# EAGLE board ldd-boardv4 (EAGLE 8.2.1)
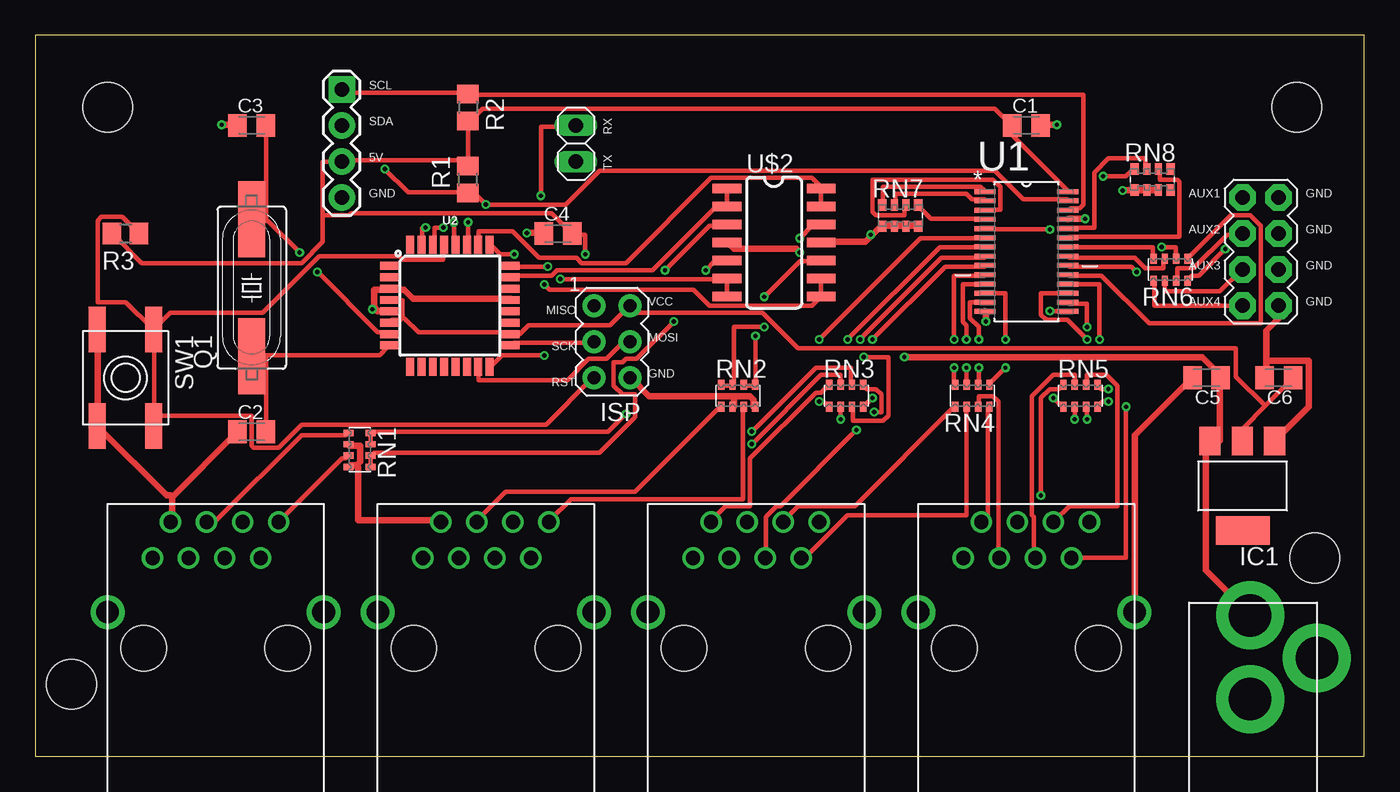
[diagram p0: board, top side]
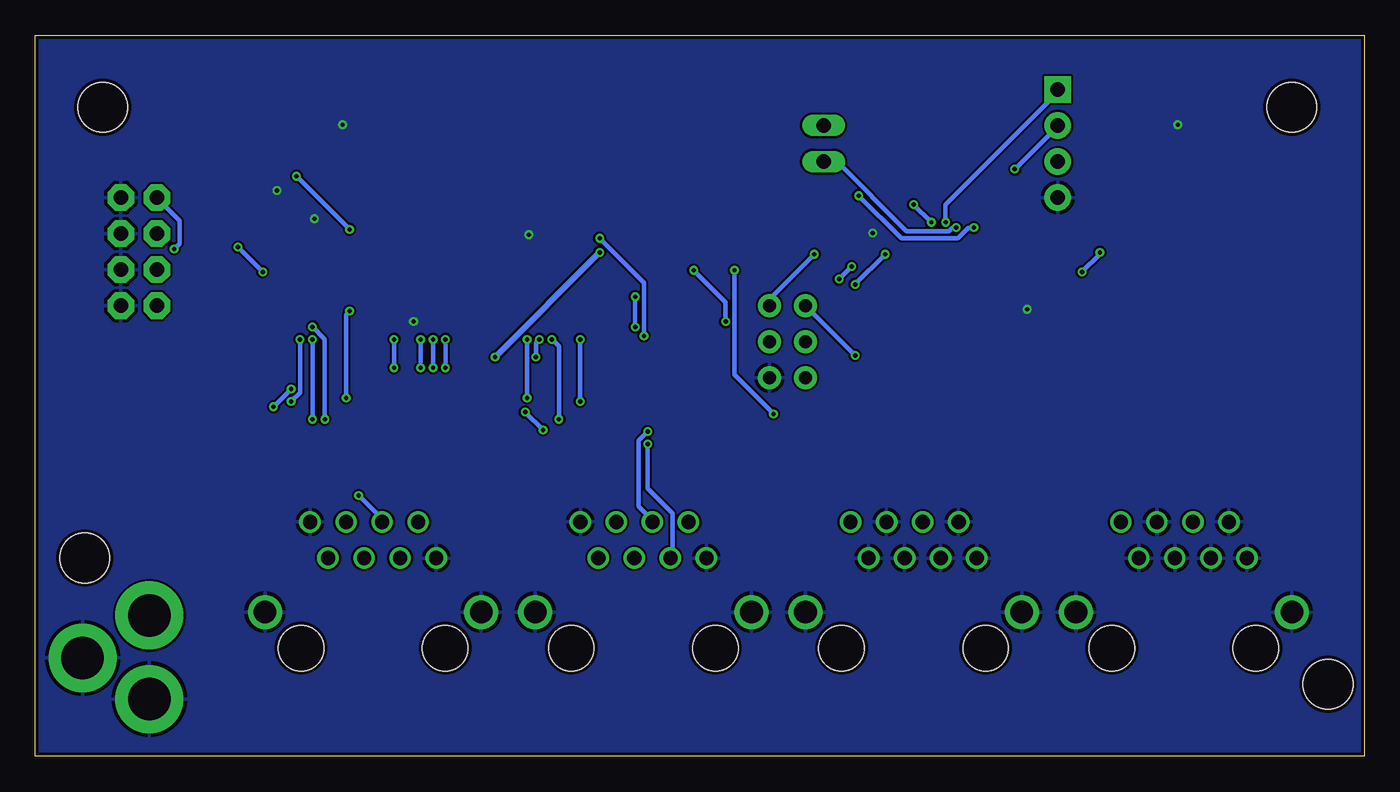
[diagram p1: board, bottom side, seen from below]

Size 93.65 x 50.79 mm. Coordinates in mm from the lower left corner, seen from the top.
Outline: 0,0 93.65,0 93.65,50.79 0,50.79 0,0
Copper layers (1*16): Top 0.035mm / dielectric 1.5mm / Bottom 0.035mm
Design rules "SeeedStudio_2layer_DRU_no_angle_20140221": minimum track width 6mil, minimum drill 12mil, track to track 6mil, track to pad 6mil, pad to pad 6mil, via to via 6mil, smd to smd 0mil, copper to edge 10mil, drill to drill 10mil, minimum pad ring 10mil, minimum via ring 6mil, stop-mask expansion 2mil, vias tented up to drill 100mil, thermal gap 10mil
Net classes: 0 default: width 0.305 mm; 1 Supply: width 0.457 mm
Holes 3.5 mm at 88.9,45.72 90.17,13.97 5.08,45.72 2.54,5.08

## Footprints (pad centres in the part's own frame; a part is rotated, then mirrored left to right if it is on the bottom)
C0805K = smd 1.3 x 1.6: 1 -1,0; 2 1,0
SOT223 = smd 1.499 x 2.007: 1 -2.261,-3.15; 2 0.025,-3.15; 3 2.311,-3.15 | smd 3.81 x 2.007: 4 0,3.15
AVRISP = drill 0.9 pad 1.626: 1 -1.27,2.54; 2 1.27,2.54; 3 -1.27,0; 4 1.27,0; 5 -1.27,-2.54; 6 1.27,-2.54
2X4 = drill 1.016 pad 1.88 octagon: 1 -3.81,-1.27; 2 -3.81,1.27; 3 -1.27,-1.27; 4 -1.27,1.27; 5 1.27,-1.27; 6 1.27,1.27; 7 3.81,-1.27; 8 3.81,1.27
1X04 = drill 1.016 pad 1.88 square: 1 0,0 | drill 1.016 pad 1.88: 2 2.54,0; 3 5.08,0; 4 7.62,0
1X02 = drill 1.016 long: 1 -1.27,0; 2 1.27,0
HC49UP = smd 5.334 x 1.93: 1 -4.826,0; 2 4.826,0
R0805 = smd 1.3 x 1.5: 1 -0.95,0; 2 0.95,0
EXBV8V = smd 0.45 x 0.7: 1 -1.2,-0.775; 2 -0.4,-0.775; 3 0.4,-0.775; 4 1.2,-0.775; 5 1.2,0.775; 6 0.4,0.775; 7 -0.4,0.775; 8 -1.2,0.775
EXB38V = smd 0.6 x 0.8: 1 -1.275,-0.75; 4 1.275,-0.75; 5 1.275,0.75; 8 -1.275,0.75 | smd 0.5 x 0.8: 2 -0.4,-0.75; 3 0.4,-0.75; 6 0.4,0.75; 7 -0.4,0.75
EVQ-Q2 = smd 3.2 x 1.2: A -3.4,-2; A' 3.4,-2; B -3.4,2; B' 3.4,2
SOP65P640X110-28N = smd 1.473 x 0.356: 1 -2.921,4.216; 2 -2.921,3.581; 3 -2.921,2.921; 4 -2.921,2.286; 5 -2.921,1.626; 6 -2.921,0.965; 7 -2.921,0.33; 8 -2.921,-0.33; 9 -2.921,-0.965; 10 -2.921,-1.626; 11 -2.921,-2.286; 12 -2.921,-2.921; 13 -2.921,-3.581; 14 -2.921,-4.216; 15 2.921,-4.216; 16 2.921,-3.581; 17 2.921,-2.921; 18 2.921,-2.286; 19 2.921,-1.626; 20 2.921,-0.965; 21 2.921,-0.33; 22 2.921,0.33; 23 2.921,0.965; 24 2.921,1.626; 25 2.921,2.286; 26 2.921,2.921; 27 2.921,3.581; 28 2.921,4.216
TQFP32-08 = smd 1.27 x 0.559: 1 -4.293,2.8; 2 -4.293,2; 3 -4.293,1.2; 4 -4.293,0.4; 5 -4.293,-0.4; 6 -4.293,-1.2; 7 -4.293,-2; 8 -4.293,-2.8; 17 4.293,-2.8; 18 4.293,-2; 19 4.293,-1.2; 20 4.293,-0.4; 21 4.293,0.4; 22 4.293,1.2; 23 4.293,2; 24 4.293,2.8 | smd 0.559 x 1.27: 9 -2.8,-4.293; 10 -2,-4.293; 11 -1.2,-4.293; 12 -0.4,-4.293; 13 0.4,-4.293; 14 1.2,-4.293; 15 2,-4.293; 16 2.8,-4.293; 25 2.8,4.293; 26 2,4.293; 27 1.2,4.293; 28 0.4,4.293; 29 -0.4,4.293; 30 -1.2,4.293; 31 -2,4.293; 32 -2.8,4.293
RJ45-TRAFO = drill 1: 1 -4.445,6.35; 2 -3.175,8.89; 3 -1.905,6.35; 4 -0.635,8.89; 5 0.635,6.35; 6 1.905,8.89; 7 3.175,6.35; 8 4.445,8.89 | drill 1.6: GND1 -7.62,2.54; GND2 7.62,2.54 | hole 3.2: -5.08,0; 5.08,0
SOIC-14 = smd 0.66 x 2.032: 1 -4.445,-3.315; 2 -3.175,-3.315; 3 -1.905,-3.315; 4 -0.635,-3.315; 5 0.635,-3.315; 6 1.905,-3.315; 7 3.175,-3.315; 8 3.175,3.315; 9 1.905,3.315; 10 0.635,3.315; 11 -0.635,3.315; 12 -1.905,3.315; 13 -3.175,3.315; 14 -4.445,3.315
PJ-102A = drill 3 pad 4.8: RING 0.1,-3.39; RING_SW -4.6,-6.29; TIP 0.1,-9.29

## Placement (x,y rotation side)
C1  10uF  [C0805K]  69.85,44.45 0 top
C2  22pF  [C0805K]  15.24,22.86 0 top
C3  22pF  [C0805K]  15.24,44.45 0 top
C4  0.1uF  [C0805K]  36.83,36.83 0 top
C5  10uF  [C0805K]  82.55,26.67 180 top
C6  10uF  [C0805K]  87.63,26.67 180 top
IC1  REG1117  [SOT223]  85.09,19.05 180 top
ISP  AVRISP-6  [AVRISP]  40.64,29.21 0 top
J1  AUX  [2X4]  86.36,35.56 270 top
J2  TWI-EXT  [1X04]  21.59,46.99 270 top
JP2  USART  [1X02]  38.1,43.18 90 top
Q1  16Mhz  [HC49UP]  15.24,33.02 90 top
R1  4.7k  [R0805]  30.48,40.64 90 top
R2  4.7k  [R0805]  30.48,45.72 270 top
R3  10k  [R0805]  6.35,36.83 180 top
RN1  10K  [EXBV8V]  22.86,21.59 270 top
RN2  10K  [EXBV8V]  49.53,25.4 0 top
RN3  220R  [EXBV8V]  57.15,25.4 0 top
RN4  220R  [EXBV8V]  66.04,25.4 180 top
RN5  220R  [EXBV8V]  73.66,25.4 0 top
RN6  220R  [EXBV8V]  80.01,34.29 180 top
RN7  10K  [EXB38V]  60.96,38.1 0 top
RN8  10K  [EXB38V]  78.74,40.64 0 top
SW1  SPST_TACT-EVQQ2  [EVQ-Q2]  6.35,26.67 270 top
U1  PCA9685PW  [SOP65P640X110-28N]  69.85,35.56 0 top
U2  ATMEGA328P_TQFP  [TQFP32-08]  29.21,31.75 0 top
U$1  RJ45-TRAFO  [RJ45-TRAFO]  69.85,7.62 0 top
U$2  LM324  [SOIC-14]  52.07,35.56 270 top
U$3  2.1MMJACKTHM  [PJ-102A]  85.72,0.64 180 top
U$4  RJ45-TRAFO  [RJ45-TRAFO]  50.8,7.62 0 top
U$5  RJ45-TRAFO  [RJ45-TRAFO]  31.75,7.62 0 top
U$6  RJ45-TRAFO  [RJ45-TRAFO]  12.7,7.62 0 top

## Library data of the parts
C1 C5 C6 = rcl; MPN: GRT21BR61E106KE13L; OC_NEWARK: 01AC8983
C2 C3 = rcl; MPN: 04025A220JAT2A; OC_NEWARK: 96M1143
C4 = rcl; MPN: 0603YC104K4Z2A; OC_NEWARK: 26M5119
IC1 = burr-brown; MPN: REG1117; OC_FARNELL: 1097566; OC_NEWARK: 14P6981
ISP SW1 U$3 = adafruit; OC_NEWARK: unknown
J1 = SparkFun-Connectors; OC_NEWARK: unknown
J2 = SparkFun-Connectors; OC_NEWARK: unknown; PROD_ID: CONN-09696
JP2 = pinhead; OC_NEWARK: unknown
Q1 = adafruit; OC_FARNELL: unknown; OC_NEWARK: unknown
R1 R2 = rcl; MF: VISHAY/DALE; MPN: CRCW08054K70JNEA; OC_NEWARK: 01H7096
R3 = rcl; MPN: TNPW080510K0DEEA; OC_NEWARK: 05R1479
RN1-RN8 = resistor-dil; OC_FARNELL: unknown; OC_NEWARK: unknown
U1 = NXP_By_element14_Batch_1; MPN: PCA9685PW; OC_FARNELL: 1854074; OC_NEWARK: 19T6398; PACKAGE: TSSOP-28; SUPPLIER: NXP
U2 = SparkFun-IC-Microcontroller; OC_NEWARK: unknown; PROD_ID: IC-09069
U$1 U$4-U$6 = con-amphenol-rj45-ld; OC_NEWARK: unknown
U$2 = seanvoisen; OC_NEWARK: unknown

## Nets
1COL: U2.23 U$2.1 U$2.2
1INT: U2.24 U$2.6 U$2.7
2COL: U2.25 U$2.8 U$2.9
2INT: U2.26 U$2.13 U$2.14
AUX1: RN6.1 U1.19
AUX2: RN6.2 U1.20
AUX3: RN6.3 U1.21
AUX4: RN6.4 U1.22
C1CO: RN1.1 U$6.4
C1INT: RN1.3 U$6.8
C2CO: RN2.1 U$5.4
C2INT: RN2.3 U$5.8
F1C1: RN3.1 U1.6
F1C2: RN3.2 U1.7
F1C3: RN3.3 U1.8
F1C4: RN3.4 U1.9
F1C5: RN4.4 U1.10
F1C6: RN4.3 U1.11
F2C1: RN4.1 U1.12
F2C2: RN4.2 U1.13
F2C3: RN5.1 U1.15
F2C4: RN5.2 U1.16
F2C5: RN5.3 U1.17
F2C6: RN5.4 U1.18
GND [Supply]: C1.2 C2.1 C3.1 C4.1 C5.2 C6.2 IC1.1 ISP.6 J1.2 J1.4 J1.6 J1.8 J2.4 RN1.2 RN1.4 RN2.2 RN2.4 RN7.1 RN7.2 RN7.3 RN7.4 RN8.1 RN8.2 RN8.3 SW1.A SW1.A' U1.14 U1.25 U2.3 U2.5 U2.21 U$1.1 U$1.8 U$1.GND1 U$1.GND2 U$2.11 U$3.RING U$3.RING_SW U$4.1 U$4.8 U$4.GND1 U$4.GND2 U$5.1 U$5.2 U$5.3 U$5.5 U$5.6 U$5.7 U$5.GND1 U$5.GND2 U$6.1 U$6.2 U$6.3 U$6.5 U$6.6 U$6.7 U$6.GND1 U$6.GND2
MISO: ISP.1 U2.16
MOSI: ISP.4 U2.15
N$1: RN1.7 RN1.8 U$2.3
N$2: RN1.5 RN1.6 U$2.5
N$3: J1.1 RN6.8
N$4: RN4.6 U$4.7
N$5: RN2.7 RN2.8 U$2.10
N$6: RN4.5 U$4.6
N$7: RN3.5 U$4.5
N$8: RN2.5 RN2.6 U$2.12
N$9: RN3.6 U$4.4
N$10: RN3.7 U$4.3
N$11: RN3.8 U$4.2
N$12: J1.3 RN6.7
N$13: J1.5 RN6.6
N$14: J1.7 RN6.5
N$15: RN7.8 U1.1
N$16: RN7.7 U1.2
N$17: RN7.6 U1.3
N$18: RN7.5 U1.4
N$19: RN8.8 U1.5
N$20: RN4.7 U$1.3
N$21: RN4.8 U$1.2
N$22: RN5.8 U$1.4
N$23: RN5.7 U$1.5
N$24: RN5.6 U$1.6
N$25: RN5.5 U$1.7
N$26: RN8.7 U1.24
N$27: C3.2 Q1.2 U2.7
N$28: RN8.6 U1.23
N$29: C2.2 Q1.1 U2.8
RST: ISP.5 R3.1 SW1.B SW1.B' U2.29
RX1: JP2.2 U2.31
SCK: ISP.3 U2.17
SCL: J2.1 R2.1 U1.26 U2.28
SDA: J2.2 R1.1 U1.27 U2.27
SUPPLY [Supply]: C5.1 IC1.3 U$2.4 U$3.TIP
TX0: JP2.1 U2.30
VCC: C1.1 C4.2 C6.1 IC1.2 ISP.2 J2.3 R1.2 R2.2 R3.2 U1.28 U2.4 U2.6 U2.18

## Tracks (layer width: path | path; a pad name or v marks a point on that pad's centre or on a via)
1COL
  Top 0.305: U2.23 33.62,33.75 33.75,33.88 36.38,33.88 36.75,34.25 43.5,34.25 47.88,38.62 48.75,38.62 U$2.2 48.75,38.88 U$2.1
1INT  (via drill 0.3)
  Top 0.305: v36.12,34.5 33.62,34.5 U2.24 | v37,33.62 48.75,33.62 U$2.6 48.75,33.5 48.75,32.5 U$2.7
  Bottom 0.305: v37,33.62 v36.12,34.5
2COL  (via drill 0.3)
  Top 0.305: v33.75,35.38 32.75,35.38 32.12,36 U2.25 | v35.88,33.25 36.25,32.88 46.38,32.88 47.5,31.75 54.75,31.75 55.38,32.38 U$2.8 55.38,32.5 55.38,33.62 U$2.9
  Bottom 0.305: v35.88,33.25 v33.75,35.38
2INT
  Top 0.305: U2.26 31.25,36.12 31.25,37 33.62,37 35.5,35.12 38.12,35.12 38.5,34.75 41.62,34.75 47.62,40.75 54.75,40.75 55.38,40.12 U$2.14 55.38,39.88 55.38,38.75 U$2.13
AUX1
  Top 0.305: RN6.1 81.25,35.12 84.25,38.12 85.62,38.12 86.38,37.38 86.38,30.5 78.5,30.5 75.12,33.88 72.88,33.88 U1.19
AUX2  (via drill 0.3)
  Top 0.305: v79.38,35.88 80.38,35.88 80.38,35.12 RN6.2 | v77.62,34.12 77.25,34.5 72.88,34.5 U1.20
  Bottom 0.305: v77.62,34.12 v79.38,35.88
AUX3
  Top 0.305: RN6.3 79.5,35 79.5,34.38 78.25,34.38 77.5,35.12 72.88,35.12 U1.21
AUX4
  Top 0.305: RN6.4 78.75,35.12 78.75,35.88 72.88,35.88 U1.22
C1CO
  Top 0.305: RN1.1 22,22.75 21.88,22.62 18.75,22.62 12.75,16.62 12.12,16.62 U$6.4
C1INT
  Top 0.305: RN1.3 22,21.12 21.88,21 21.62,21 17.25,16.62 U$6.8
C2CO
  Top 0.305: RN2.1 48.25,24.62 42.25,18.62 33.12,18.62 31.12,16.62 U$5.4
C2INT
  Top 0.305: RN2.3 49.88,24.62 49.88,18.12 37.75,18.12 36.25,16.62 U$5.8
F1C1  (via drill 0.3)
  Top 0.305: v55.25,25 55.5,25 55.88,24.62 RN3.1 | v55.25,29.38 62.38,36.5 66.88,36.5 U1.6
  Bottom 0.305: v55.25,29.38 v55.25,25
F1C2  (via drill 0.3)
  Top 0.305: v56.75,23.75 RN3.2 | v57.25,29.38 63.75,35.88 66.88,35.88 U1.7
  Bottom 0.305: v56.75,23.75 56.75,28.88 v57.25,29.38
F1C3  (via drill 0.3)
  Top 0.305: v58.38,28.12 60.12,28.12 60.12,24 59.75,23.62 57.62,23.62 57.62,24.62 RN3.3 | v58.12,29.38 63.88,35.12 66.88,35.12 U1.8
  Bottom 0.305: v58.38,28.12 58.38,29.12 v58.12,29.38
F1C4  (via drill 0.3)
  Top 0.305: v59,25.25 58.38,24.62 RN3.4 | v59,29.38 64.12,34.5 66.88,34.5 U1.9
  Bottom 0.305: v59,29.38 v59,25.25
F1C5  (via drill 0.3)
  Top 0.305: v64.75,27.38 64.75,26.25 RN4.4 | v64.75,29.38 64.75,33.88 66.88,33.88 U1.10
  Bottom 0.305: v64.75,29.38 v64.75,27.38
F1C6  (via drill 0.3)
  Top 0.305: v65.62,27.38 65.62,26.25 RN4.3 | v65.62,29.38 65.62,30.38 65.38,30.62 65.38,33.25 66.88,33.25 U1.11
  Bottom 0.305: v65.62,29.38 v65.62,27.38
F2C1  (via drill 0.3)
  Top 0.305: v68.38,27.38 67.25,26.25 RN4.1 | v68.38,29.38 68.38,32.62 67,32.62 U1.12
  Bottom 0.305: v68.38,29.38 v68.38,27.38
F2C2  (via drill 0.3)
  Top 0.305: v66.5,27.38 66.5,26.25 RN4.2 | v66.5,29.38 66.5,30.25 65.88,30.88 65.88,32 66.88,32 U1.13
  Bottom 0.305: v66.5,29.38 v66.5,27.38
F2C3  (via drill 0.3)
  Top 0.305: v71.75,25.25 72.38,24.62 RN5.1 | v71.5,31.38 72.75,31.38 U1.15
  Bottom 0.305: v71.75,25.25 71.75,31.12 v71.5,31.38
F2C4  (via drill 0.3)
  Top 0.305: v73.25,23.75 RN5.2 | v74.12,30.25 74.12,31.88 72.88,31.88 U1.16
  Bottom 0.305: v73.25,23.75 73.25,29.38 v74.12,30.25
F2C5  (via drill 0.3)
  Top 0.305: v74.12,23.75 74.12,24.62 RN5.3 | v74.12,29.38 72.75,30.75 71.25,30.75 70.88,31.12 70.88,32.62 72.75,32.62 U1.17
  Bottom 0.305: v74.12,29.38 v74.12,23.75
F2C6  (via drill 0.3)
  Top 0.305: v75.62,25 75.25,25 74.88,24.62 RN5.4 | v75,29.38 75,33.25 72.88,33.25 U1.18
  Bottom 0.305: v75.62,25 75,25.62 v75,29.38
GND  (via drill 0.3)
  Top 0.457: SW1.A 4.38,30 4.38,23.38 SW1.A' 4.5,23.12 9.25,18.38 9.5,18.38 9.62,18.25 | 23.88,31.62 24.12,31.38 24.88,31.38 U2.5 | 23.88,31.62 23.88,32.88 24.88,32.88 U2.3 25.12,32.88 26,32.88 26.62,32.25 33.5,32.25 U2.21 | RN7.4 62.12,37.38 61.5,37.38 RN7.3 61.25,37.38 60.75,37.38 RN7.2 60.5,37.38 59.75,37.38 RN7.1 59.5,37.25 58.94,36.69 | 58.94,36.69 58.5,36.25 55.5,36.25 U$2.11 | 22.62,20.5 22.25,20.5 22.12,20.38 RN1.4 | 22.62,20.5 22.88,20.75 22.88,21.88 22.12,21.88 RN1.2 | 49.25,25.38 49.25,24.62 RN2.2 | 49.25,25.38 50.38,25.38 50.62,25.12 50.62,24.62 RN2.4 | RN8.3 79.12,39.88 78.5,39.88 RN8.2 78.25,39.88 77.5,39.88 RN8.1 77.25,39.88 v76.62,39.88 | 49.25,25.38 43.25,25.38 42,26.62 ISP.6 | 22.62,20.5 22.75,20.38 22.75,16.62 28.5,16.62 U$5.2 | v67,30.62 67,31.25 U1.14 | v74,37.88 72.88,37.88 U1.25 | 9.62,18.25 14.12,22.75 C2.1 | 9.62,18.25 9.62,16.62 U$6.2 | v13.12,44.5 14.12,44.5 C3.1 | v34.62,36.88 35.75,36.88 C4.1 | C5.2 81.5,26.62 77.5,22.62 77.5,10.25 U$1.GND2 | 86.75,27.88 86.75,30 87.62,30.88 J1.8 | 86.75,27.88 86.75,26.75 C6.2 | v72,44.5 70.88,44.5 C1.2 | 86.75,27.88 89.75,27.88 89.75,24.62 87.38,22.25 IC1.1 | v58.88,36.75 58.94,36.69 | v23.75,31.5 23.88,31.62
  pour Bottom: 93.98,50.8 0,50.8 -1.27,0 93.98,0
MISO  (via drill 0.3)
  Top 0.305: v35.88,28.25 32.88,28.25 32.12,27.5 U2.16
  Bottom 0.305: v35.88,28.25 ISP.1
MOSI
  Top 0.305: U2.15 31.25,27.38 31.25,26.5 37.5,26.5 39,28 40.25,28 41.38,29.12 41.88,29.12 ISP.4
N$1  (via drill 0.3)
  Top 0.305: RN1.7 23.62,22.75 RN1.8 23.75,22.88 40.38,22.88 v41.62,24.12 | v44.38,34.25 47.5,37.38 48.75,37.38 U$2.3
  Bottom 0.305: v41.62,24.12 44.38,26.88 v44.38,34.25
N$2  (via drill 0.3)
  Top 0.305: RN1.5 23.62,20.5 23.62,21.12 RN1.6 23.75,21.25 23.88,21.38 39.75,21.38 42.25,23.88 42.25,25.5 41.38,25.5 40.75,26.12 40.75,27.75 41.38,27.75 41.62,28 42.38,28 v45,30.62 | v47.25,34.25 47.88,34.88 48.75,34.88 U$2.5
  Bottom 0.305: v45,30.62 45,32 v47.25,34.25
N$3  (via drill 0.3)
  Top 0.305: v83.88,35.75 82,33.88 81.5,33.88 81.25,33.62 RN6.8
  Bottom 0.305: v83.88,35.75 83.5,36.12 83.5,37.75 85,39.25 J1.1
N$4
  Top 0.305: RN4.6 65.62,24.62 65.62,17 57.25,17 54.25,14 54,14 U$4.7
N$5  (via drill 0.3)
  Top 0.305: RN2.8 48.38,26.12 49.12,26.12 RN2.7 49.25,26.25 49.25,30.25 v51.38,30.25 | v51.38,32.38 53.88,34.88 55.38,34.88 U$2.10
  Bottom 0.305: v51.38,32.38 v51.38,30.25
N$6
  Top 0.305: RN4.5 64.75,24.62 57.75,17.62 53.75,17.62 52.75,16.62 U$4.6
N$7  (via drill 0.3)
  Top 0.305: v59.12,24.25 59.62,24.25 59.62,25.5 59.25,25.88 58.62,25.88 58.38,26.12 RN3.5 | v57.88,23 52.5,17.62 52.25,17.62 51.5,16.88 51.5,14 U$4.5
  Bottom 0.305: v57.88,23 v59.12,24.25
N$8  (via drill 0.3)
  Top 0.305: RN2.6 50,26.12 50.62,26.12 RN2.5 50.75,26.25 v50.75,29.62 | v53.88,36.5 54.75,37.38 55.38,37.38 U$2.12
  Bottom 0.305: v50.75,29.62 50.75,33.38 v53.88,36.5
N$9  (via drill 0.3)
  Top 0.305: v50.5,22.88 55,27.38 57.5,27.38 57.5,26.25 RN3.6
  Bottom 0.305: v50.5,22.88 51.12,22.25 51.12,17.62 50.12,16.62 U$4.4
N$10  (via drill 0.3)
  Top 0.305: RN3.7 56.75,26.88 55.38,26.88 v50.5,22
  Bottom 0.305: v50.5,22 50.5,18.88 48.75,17.12 48.75,14.12 48.88,14 U$4.3
N$11
  Top 0.305: RN3.8 55.88,26.12 55.38,25.62 55,25.62 50.38,21 50.38,17.62 48.62,17.62 47.62,16.62 U$4.2
N$12
  Top 0.305: RN6.7 80.5,33.62 80.5,34.38 81.62,34.38 84,36.75 85,36.75 J1.3
N$13
  Top 0.305: RN6.6 79.62,33.5 79.62,32.75 83.5,32.75 85,34.25 J1.5
N$14
  Top 0.305: J1.7 78.88,31.75 78.88,33.5 RN6.5
N$15
  Top 0.305: RN7.8 59.75,38.88 59.75,40.12 66.62,40.12 66.88,39.88 U1.1
N$16
  Top 0.305: RN7.7 60.62,38.88 60.62,39.62 65.62,39.62 66,39.25 66.88,39.25 U1.2
N$17
  Top 0.305: RN7.6 61.25,38.75 61.25,38.12 59.25,38.12 59,38.38 59,40.62 67.5,40.62 68,40.12 68,38.5 67,38.5 U1.3
N$18
  Top 0.305: RN7.5 62.25,38.75 63.12,37.88 66.88,37.88 U1.4
N$19  (via drill 0.3)
  Top 0.305: v75.25,40.88 76.88,40.88 77.38,41.38 RN8.8 | v71.5,37.12 67,37.12 U1.5
  Bottom 0.305: v71.5,37.12 v75.25,40.88
N$20
  Top 0.305: RN4.7 66.5,24.62 66.5,25.38 67.5,25.38 67.88,25 67.88,14 U$1.3
N$21
  Top 0.305: RN4.8 67.12,24.62 67.12,16.62 66.75,16.62 U$1.2
N$22  (via drill 0.3)
  Top 0.305: v70.88,18.38 70.88,25.25 71.5,25.88 72.12,25.88 72.38,26.12 RN5.8
  Bottom 0.305: v70.88,18.38 69.12,16.62 U$1.4
N$23
  Top 0.305: RN5.7 73.25,26.25 73.25,26.88 71.75,26.88 70.25,25.38 70.25,17 70.38,16.88 70.38,14 U$1.5
N$24
  Top 0.305: RN5.6 74.12,26.25 74.12,26.88 75.5,26.88 76.25,26.12 76.25,17.62 72.88,17.62 71.88,16.62 U$1.6
N$25  (via drill 0.3)
  Top 0.305: v75.62,25.88 75.12,25.88 74.88,26.12 RN5.5 | v76.88,24.62 76.88,14 73.12,14 U$1.7
  Bottom 0.305: v76.88,24.62 v75.62,25.88
N$26
  Top 0.305: RN8.7 78.25,41.5 78.25,42.12 75.62,42.12 74.62,41.12 74.62,37.25 72.88,37.25 U1.24
N$27  (via drill 0.3)
  Top 0.305: v19.88,34.12 24.12,29.88 24.75,29.88 24.88,29.75 U2.7 | v18.62,35.5 16.38,37.75 16.25,37.75 | 16.25,37.75 15.25,37.75 Q1.2 | 16.25,37.75 16.25,44.38 C3.2
  Bottom 0.305: v19.88,34.12 18.62,35.38 v18.62,35.5
N$28
  Top 0.305: RN8.6 79.25,41.38 79.25,40.62 80.5,40.62 80.62,40.5 80.62,36.62 72.88,36.62 U1.23
N$29
  Top 0.305: 16.25,28.25 15.25,28.25 Q1.1 | 16.25,28.25 24.25,28.25 24.88,28.88 U2.8 | 16.25,28.25 16.25,22.88 C2.2
RST
  Top 0.305: U2.29 28.75,36 28.75,35 25.88,35 25.62,35.25 20,35.25 16,31.25 9.5,31.25 8.38,30.12 SW1.B | R3.1 7.25,36.88 6.12,38 4.62,38 4.38,37.75 4.38,32 6.38,32 8.25,30.12 SW1.B | SW1.B 8.38,30 8.38,23.38 SW1.B' 8.5,24 15.25,24 15.25,21.88 15.38,21.75 17.12,21.75 18.75,23.38 36,23.38 39.25,26.62 ISP.5
RX1  (via drill 0.3)
  Top 0.305: v27.5,37.25 27.25,37.25 27.25,36.12 U2.31 | v35.62,39.5 35.62,44.38 38,44.38 JP2.2
  Bottom 0.305: v27.5,37.25 27.88,37.25 28.62,36.5 32.62,36.5 v35.62,39.5
SCK
  Top 0.305: U2.17 33.62,29 33.75,29.12 39.25,29.12 ISP.3
SCL  (via drill 0.3)
  Top 0.305: v29.5,37.62 29.5,36.12 U2.28 | U1.26 72.88,38.5 73,38.62 73.62,38.62 73.88,38.88 73.88,46.62 30.5,46.62 R2.1 30.38,46.75 21.75,46.75 21.62,46.88 J2.1
  Bottom 0.305: v29.5,37.62 29.5,38.88 21.5,46.88 J2.1
SDA  (via drill 0.3)
  Top 0.305: v30.5,37.62 30.5,36.12 U2.27 | U1.27 72.75,39.25 69.62,39.25 67.62,41.25 39.75,41.25 37.38,38.88 v31.75,38.88 31,39.62 30.5,39.62 R1.1 30.38,39.75 26.25,39.75 v24.62,41.38
  Bottom 0.305: v31.75,38.88 v30.5,37.62 | v24.62,41.38 21.62,44.38 J2.2
SUPPLY  (via drill 0.3)
  Top 0.457: v53.88,35.5 53.62,35.75 49.25,35.75 48.88,36.12 U$2.4 | v61.25,28.12 82.25,28.12 83.5,26.88 C5.1 83.5,26.62 83.5,22.25 82.88,22.25 IC1.3 82.62,22.12 82.5,22.12 82.5,13.12 85.62,10 U$3.TIP
  Bottom 0.457: v61.25,28.12 v53.88,35.5
TX0  (via drill 0.3)
  Top 0.305: v28.75,37.25 28.12,37.25 28.12,36.12 U2.30
  Bottom 0.305: v28.75,37.25 29,37.25 29.25,37 32.25,37 37.12,41.88 38,41.88 JP2.1
VCC  (via drill 0.3)
  Top 0.305: 86.69,24.69 85.12,23.12 85.12,22.25 IC1.2 | 86.69,24.69 88.62,26.62 C6.1 | 25.88,30.88 25.75,30.75 25.12,30.75 25,30.62 U2.6 | 25.88,30.88 25.88,32.12 25,32.12 U2.4 | 25.88,30.88 26,30.88 27,29.88 33.38,29.88 U2.18 34.12,29.75 34.75,30.38 40.5,30.38 41.88,31.75 ISP.2 41.5,31.25 51.25,31.25 53.75,28.75 84.62,28.75 84.62,26.75 86.69,24.69 | U1.28 72.75,39.88 68.88,43.75 68.88,44.38 C1.1 68.75,44.5 67.62,45.62 31.5,45.62 30.62,44.75 R2.2 30.5,44.75 30.5,41.62 R1.2 30.38,42 21.62,42 J2.3 21.5,41.88 20.25,41.88 20.25,38.12 | 20.25,38.12 20.25,36.25 18.75,34.75 7.5,34.75 5.5,36.75 R3.2 | 20.25,38.12 22.12,38.12 22.25,38.25 36.38,38.25 37.75,36.88 C4.2 37.88,36.75 38.75,36.75 v38.75,35.38
  Bottom 0.305: v38.75,35.38 41.88,32.25 41.88,31.75 ISP.2

## Text on the board
tNames: SCL | SDA | RX | 5V | TX | GND | AUX1 | GND | AUX2 | GND | AUX3 | GND | MISO | VCC | AUX4 | GND | SCK | MOSI | RST | GND